# EAGLE board avr_prog (EAGLE 6.6.0)
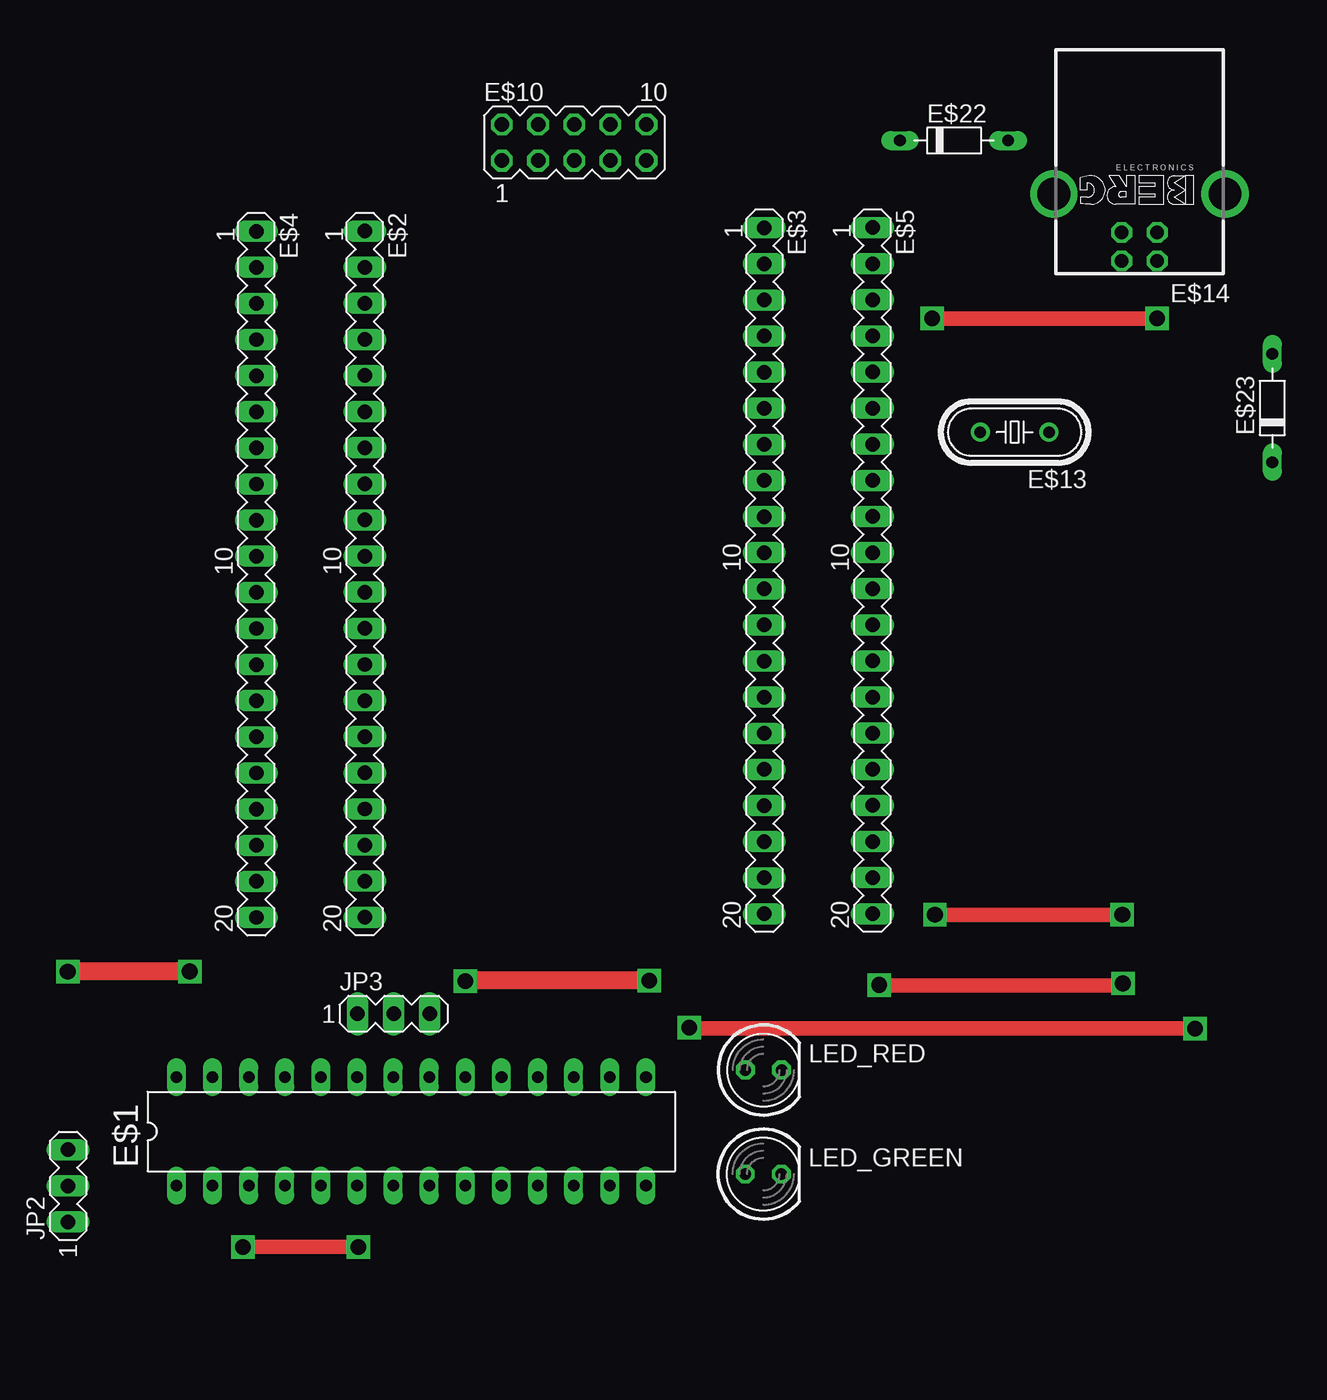
[diagram p0: board, top side]
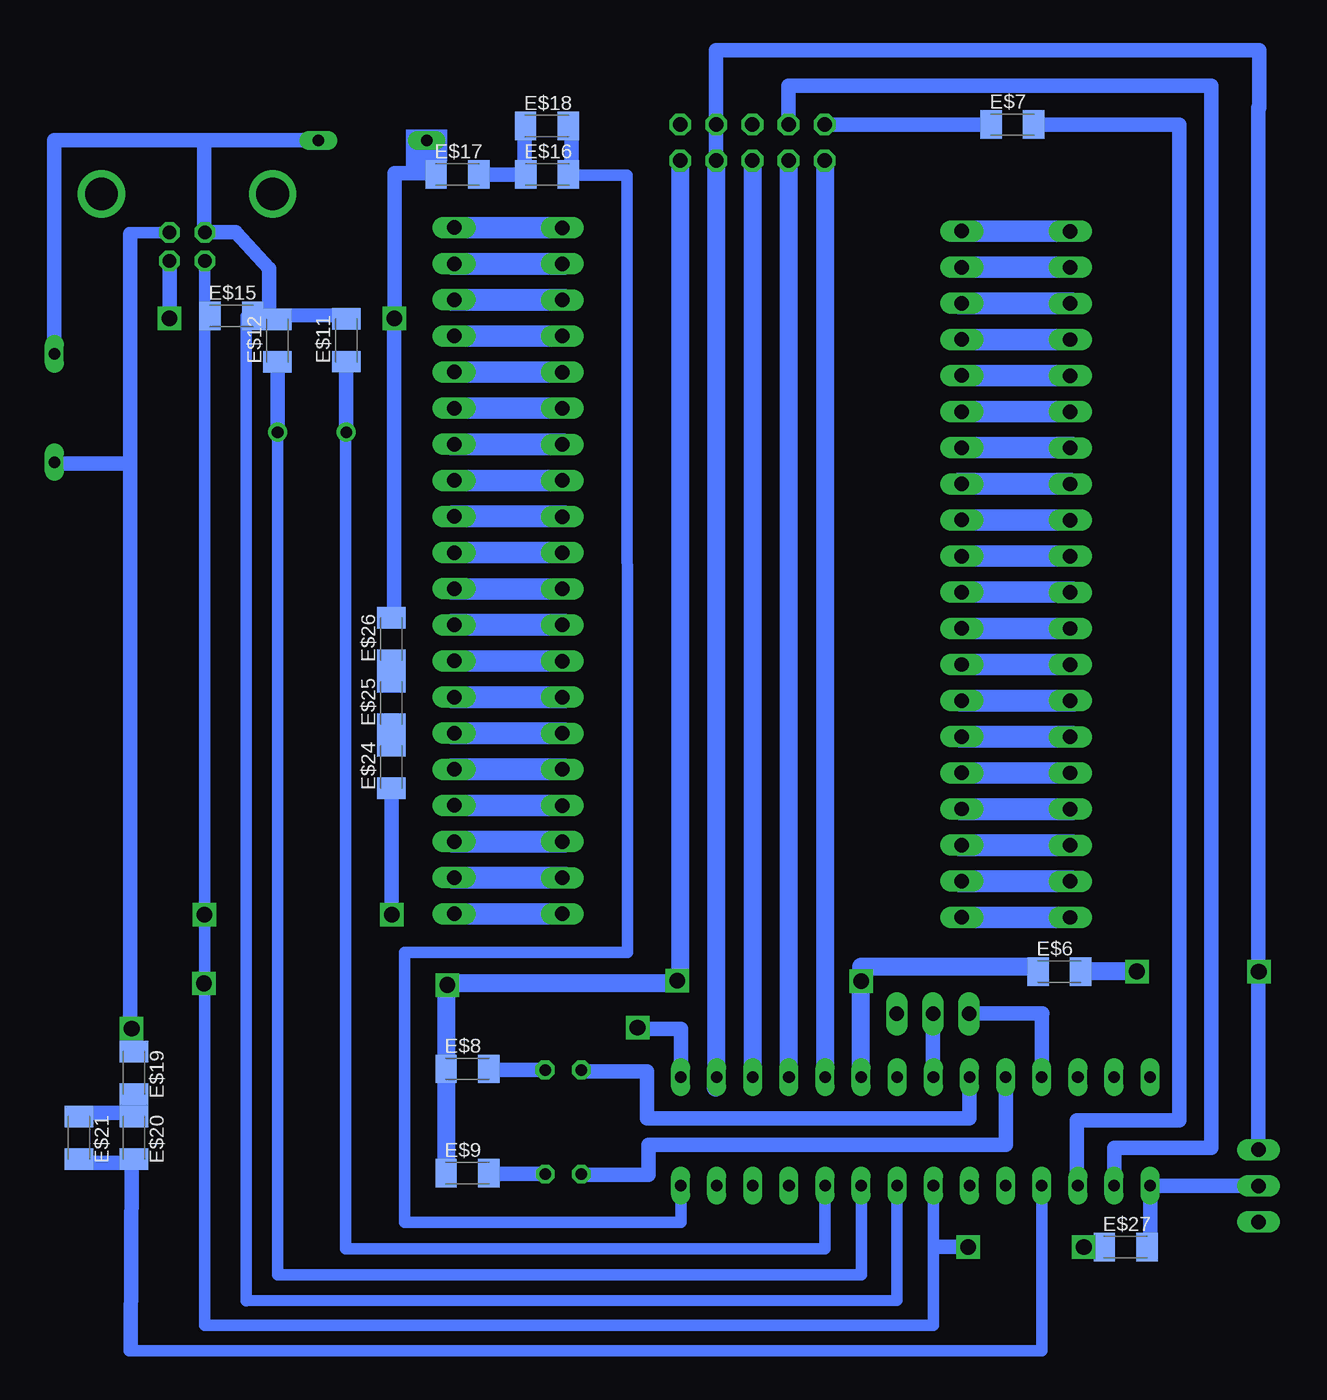
[diagram p1: board, bottom side, seen from below]

No outline drawn. Coordinates in mm, seen from the top.
Copper layers (1*16): Top 0.035mm / dielectric 1.5mm / Bottom 0.035mm
Design rules "default": minimum track width 10mil, minimum drill 24mil, track to track 8mil, track to pad 8mil, pad to pad 8mil, via to via 8mil, smd to smd 8mil, copper to edge 40mil, drill to drill 8mil, minimum pad ring 10mil, minimum via ring 8mil, stop-mask expansion 4mil, vias tented up to drill 0mil, thermal gap 10mil

## Footprints (pad centres in the part's own frame; a part is rotated, then mirrored left to right if it is on the bottom)
DIL28-3 = drill 0.813 long: 1 -16.51,-3.81; 2 -13.97,-3.81; 3 -11.43,-3.81; 4 -8.89,-3.81; 5 -6.35,-3.81; 6 -3.81,-3.81; 7 -1.27,-3.81; 8 1.27,-3.81; 9 3.81,-3.81; 10 6.35,-3.81; 11 8.89,-3.81; 12 11.43,-3.81; 13 13.97,-3.81; 14 16.51,-3.81; 15 16.51,3.81; 16 13.97,3.81; 17 11.43,3.81; 18 8.89,3.81; 19 6.35,3.81; 20 3.81,3.81; 21 1.27,3.81; 22 -1.27,3.81; 23 -3.81,3.81; 24 -6.35,3.81; 25 -8.89,3.81; 26 -11.43,3.81; 27 -13.97,3.81; 28 -16.51,3.81
MA20-1 = drill 1.016 long: 1 -24.13,0; 2 -21.59,0; 3 -19.05,0; 4 -16.51,0; 5 -13.97,0; 6 -11.43,0; 7 -8.89,0; 8 -6.35,0; 9 -3.81,0; 10 -1.27,0; 11 1.27,0; 12 3.81,0; 13 6.35,0; 14 8.89,0; 15 11.43,0; 16 13.97,0; 17 16.51,0; 18 19.05,0; 19 21.59,0; 20 24.13,0
C1206K = smd 1.5 x 2: 1 -1.5,0; 2 1.5,0
MA05-2 = drill 1.016 octagon: 1 -5.08,-1.27; 2 -5.08,1.27; 3 -2.54,-1.27; 4 -2.54,1.27; 5 0,-1.27; 6 0,1.27; 7 2.54,-1.27; 8 2.54,1.27; 9 5.08,-1.27; 10 5.08,1.27
HC49/S = drill 0.813: 1 -2.413,0; 2 2.413,0
PN61729-S = drill 0.95 octagon: 1 1.25,4.71; 2 -1.25,4.71; 3 -1.25,2.71; 4 1.25,2.71 | drill 2.3 pad 2.9: S1 -6.02,0; S2 6.02,0
D-7.5 = drill 0.813 long: A 3.81,0; C -3.81,0
MA03-1 = drill 1.016 long: 1 -2.54,0; 2 0,0; 3 2.54,0
LED5MM = drill 0.813 octagon: A -1.27,0; K 1.27,0

## Placement (x,y rotation side)
E$1  [DIL28-3]  30.43,9.97 0 top
E$2  [MA20-1]  27.16,49.16 270 top
E$3  [MA20-1]  55.26,49.4 270 top
E$4  [MA20-1]  19.53,49.15 270 top
E$5  [MA20-1]  62.87,49.41 270 top
E$6  10k Ohm  [C1206K]  20.3,21.21 0 bottom
E$7  1kOhm  [C1206K]  23.6,80.78 0 bottom
E$8  1kOhm  [C1206K]  61.93,14.37 0 bottom
E$9  1kOhm  [C1206K]  61.93,7.04 0 bottom
E$10  [MA05-2]  41.89,79.52 0 top
E$11  22pF  [C1206K]  70.46,65.61 90 bottom
E$12  22pF  [C1206K]  75.3,65.59 90 bottom
E$13  [HC49/S]  72.87,59.15 180 top
E$14  [PN61729-S]  81.65,75.91 180 top
E$15  100nF  [C1206K]  78.54,67.34 0 bottom
E$16  22pF  [C1206K]  56.33,77.28 0 bottom
E$17  22pF  [C1206K]  62.64,77.28 0 bottom
E$18  22pF  [C1206K]  56.35,80.68 0 bottom
E$19  22pF  [C1206K]  85.38,14.09 270 bottom
E$20  22pF  [C1206K]  85.38,9.52 270 bottom
E$21  22pF  [C1206K]  89.26,9.52 270 bottom
E$22  [D-7.5]  68.61,79.66 0 top
E$23  [D-7.5]  90.99,60.85 90 top
E$24  22pF  [C1206K]  67.29,35.6 90 bottom
E$25  22pF  [C1206K]  67.29,40.1 90 bottom
E$26  22pF  [C1206K]  67.29,44.6 90 bottom
E$27  10k Ohm  [C1206K]  15.64,1.84 0 bottom
JP2  [MA03-1]  6.29,6.14 90 top
JP3  [MA03-1]  29.19,18.24 0 top
LED_GREEN  [LED5MM]  55.19,6.97 0 top
LED_RED  [LED5MM]  55.2,14.29 0 top

## Library data of the parts
E$1 = atmel
E$2-E$5 E$10 JP2 JP3 = con-lstb
E$6-E$9 E$27 = rcl
E$11 E$12 E$15-E$21 E$24-E$26 = ref-packages
E$13 = crystal
E$14 = con-berg
E$22 E$23 = diode
LED_GREEN LED_RED = led

## Tracks (layer width: path | path; a pad name or v marks a point on that pad's centre or on a via)
S$1
  Bottom 1.27: 44.46,78.3 44.46,13.05
S$2
  Bottom 1.27: 41.89,78.37 41.89,13.64
S$3
  Bottom 1.27: 39.36,78.28 39.36,13.69
S$4
  Bottom 1.27: 36.79,78.28 36.79,13.59
S$5
  Bottom 1.016: 19.07,6.18 19.07,10.75 11.86,10.75 11.86,80.78 22.29,80.78 | 24.97,80.77 36.93,80.77
S$6
  Bottom 1.016: 39.34,80.78 39.34,83.53 9.63,83.53 9.63,8.81 16.44,8.81 16.44,6.18
S$7
  Bottom 1.016: 26.64,13.78 26.64,10.88 49.29,10.88 49.29,14.21 53.97,14.21
S$8
  Bottom 1.016: 24.06,13.78 24.06,9.02 49.2,9.02 49.2,6.92 53.97,6.92
S$9
  Bottom 1.016: 56.49,14.3 60.48,14.3 | 56.43,6.97 60.42,6.97
S$10
  Bottom 1.016: 29.19,13.64 29.19,18.24
S$11
  Bottom 1.016: 21.52,13.77 21.52,18.24
S$12
  Bottom 1.016: 26.65,18.26 21.51,18.26
S$13
  Bottom 1.016: 6.3,8.67 6.3,81.98
S$14
  Bottom 1.016: 13.91,6.16 5.9,6.16
S$15
  Bottom 1.016: 44.46,78.08 44.46,86.03 6.25,86.03 6.25,81.98
S$16
  Bottom 1.27: 46.99,78.26 46.99,20.37 63.45,20.37 63.45,6.74
S$17  (via drill 1.1)
  other vias: 47.18,20.58 63.35,20.27 80.48,20.38 82.89,67.16 67.07,67.16 49.97,17.28 85.55,17.2 67.26,25.21 80.44,25.22
S$18
  Top 1.27: 47.19,20.58 34.25,20.58
S$19  (via drill 1.1)
  other vias: 34.23,20.54
S$20
  Bottom 1.27: 34.24,13.76 34.24,20.57
S$21  (via drill 1.1)
  Bottom 1.27: v14.85,21.22 18.79,21.22
  other vias: 18.58,1.84 26.71,1.84
S$22
  Top 1.27: 14.84,21.21 6.33,21.21
S$23  (via drill 1.1)
  other vias: 6.27,21.21
S$24
  Bottom 1.27: 34.23,20.53 34.23,21.57 21.8,21.57
S$25
  Bottom 1.016: 70.45,59.14 70.45,64.37 | 75.27,59.12 75.27,64.35
S$26
  Bottom 1.016: 80.44,73.23 78.23,73.23 75.89,70.66 75.89,67.34 70.02,67.37
S$27
  Bottom 0.813: 36.8,6.19 36.8,1.7 70.5,1.7 70.5,59.16
S$28
  Bottom 0.813: 46.93,6.13 46.93,3.57 66.35,3.57 66.35,22.56 50.68,22.56 50.7,77.24 55.21,77.24
S$29
  Bottom 0.813: 34.21,6.19 34.21,-0.1 75.29,-0.1 75.29,59.26
S$30
  Bottom 0.813: 31.71,6.19 31.71,-1.9 77.49,-1.96 77.49,67.3 75.19,67.36
S$31
  Bottom 0.813: 80.4,71.23 80.4,-3.67 29.16,-3.67 29.16,6.3
S$32
  Top 1.016: 63.35,20.25 80.42,20.25 80.42,20.31
S$33
  Bottom 1.016: 54.87,81.11 54.61,81.11 54.61,76.88
S$34
  Bottom 1.016: 57.92,81.08 57.92,77.25 61.16,77.25
S$35
  Bottom 1.016: 67.07,67.15 67.07,77.36 64.2,77.36
S$36
  Top 1.016: 67.07,67.15 82.91,67.15
S$37
  Bottom 1.016: 82.89,71.19 82.89,67.13
S$38
  Bottom 0.813: 21.54,6.18 21.54,-5.47 85.73,-5.47
S$39
  Top 1.016: 49.96,17.29 49.96,17.2 85.63,17.2
S$40
  Bottom 1.016: 46.91,13.82 46.91,17.18 50.12,17.18
S$41
  Bottom 0.813: 82.84,73.18 85.73,73.18
S$42
  Bottom 1.016: 89.31,11.26 85.45,11.26 85.37,12.51
S$43
  Bottom 1.016: 89.18,7.77 85.54,7.77 85.62,-5.37
S$44
  Bottom 1.016: 85.58,17.27 85.66,17.27 85.66,73.06
S$45
  Bottom 1.016: 72.43,79.67 80.22,79.67 80.44,79.67 | 80.44,79.67 80.44,73.27 | 91,64.61 91,79.67 80.44,79.67
S$46
  Bottom 1.016: 91.04,56.98 91.04,56.93 85.71,56.93
S$47
  Top 1.016: 67.25,25.2 80.46,25.2 80.46,25.23
S$48
  Bottom 1.016: 67.25,25.2 67.25,33.98 67.21,33.98
S$49
  Bottom 1.016: 67.04,67.16 67.1,67.16 67.1,45.98
S$50
  Bottom 1.016: 13.92,6.24 13.92,1.97 14.14,1.97
S$51
  Top 1.016: 18.57,1.85 26.71,1.85 26.71,1.87
S$52
  Bottom 1.016: 26.69,1.85 28.96,1.85
(copper drawn outside any net)
  shapes: Bottom area x44